# Altium PCB SCH_onelayer.PcbDoc
Units mil, origin at the board's own origin, x right, y up, seen from the top; angles counter-clockwise.
Board outline 3994.31 x 4787.81 mil, 2 copper layers (Top Layer, Bottom Layer); 42 components, 43 nets, 145 pads, 12 vias.
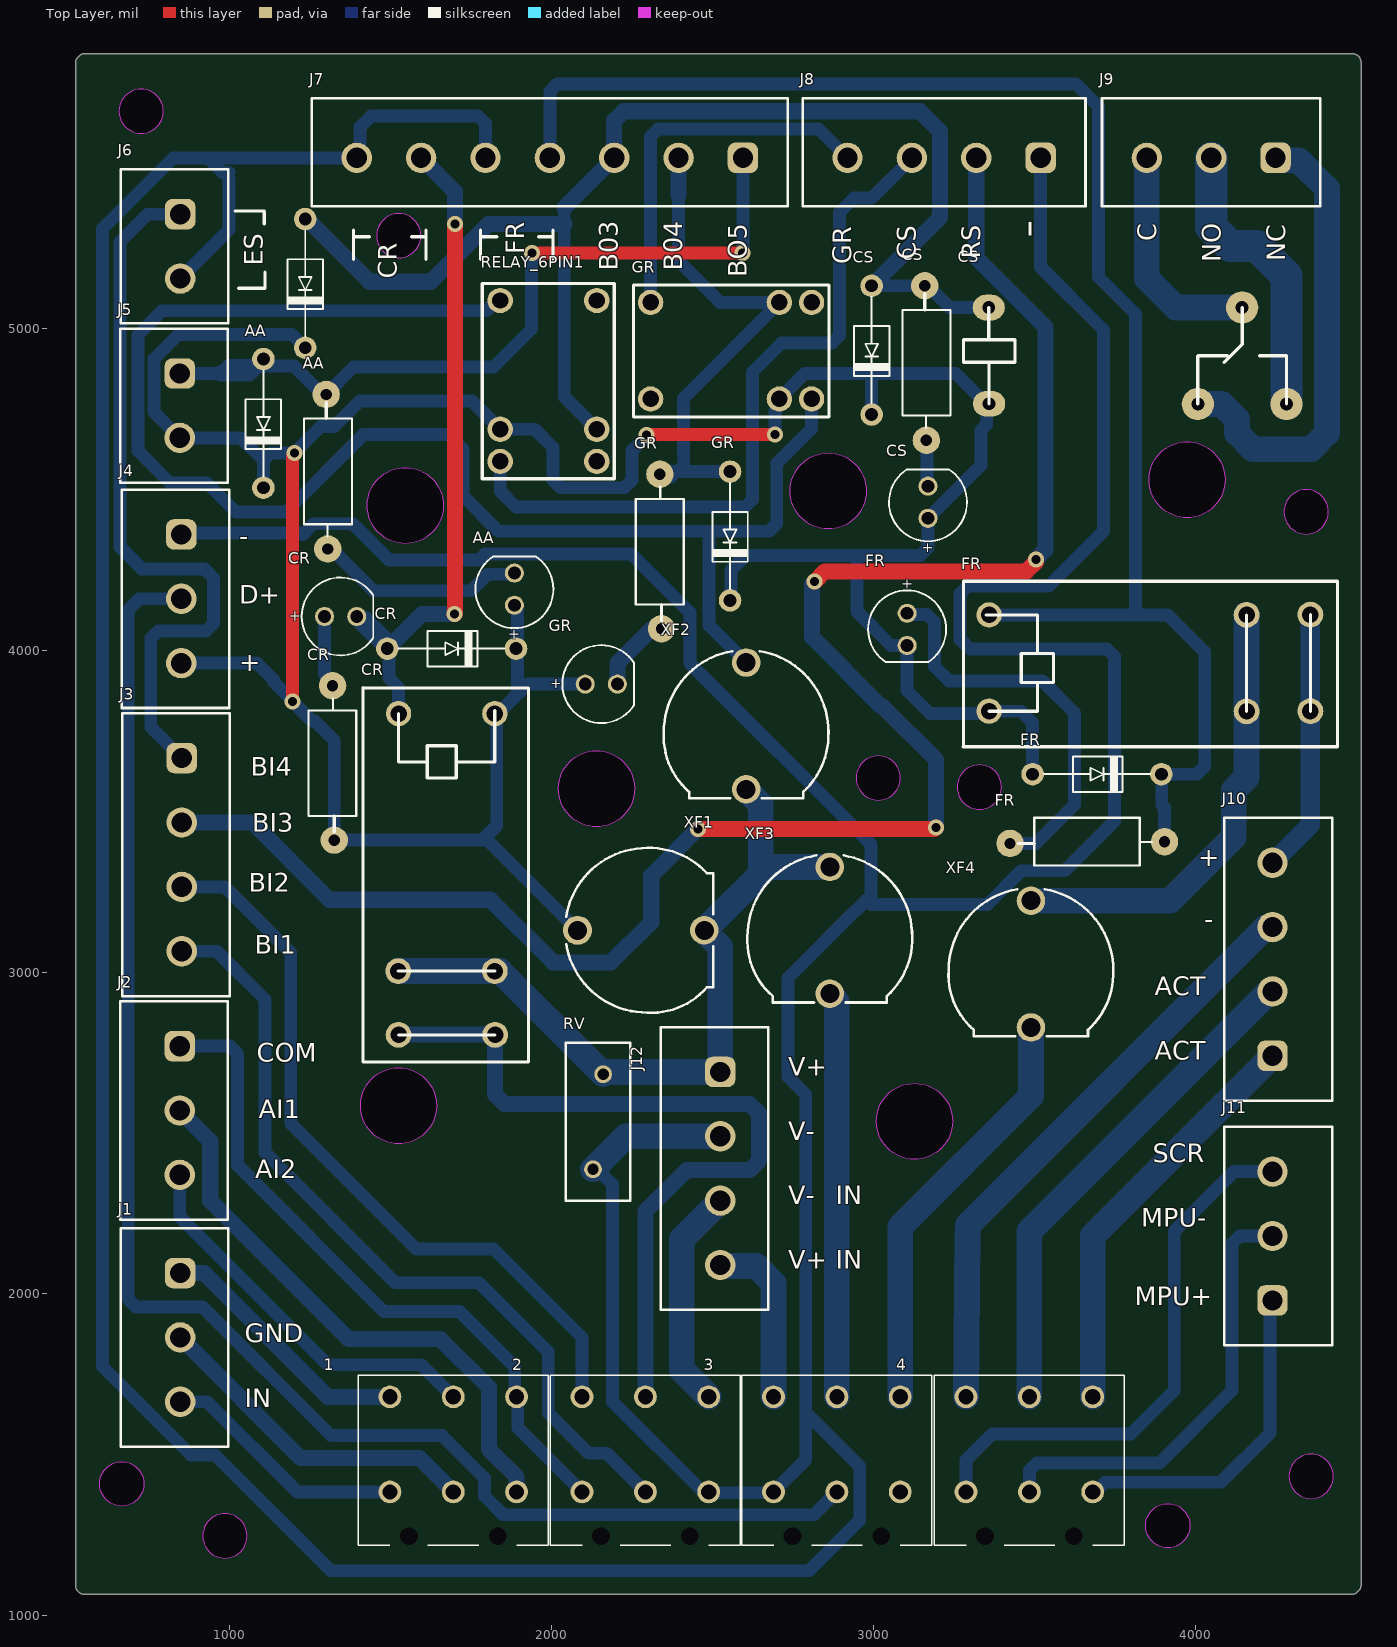
[diagram p0: Top Layer view]
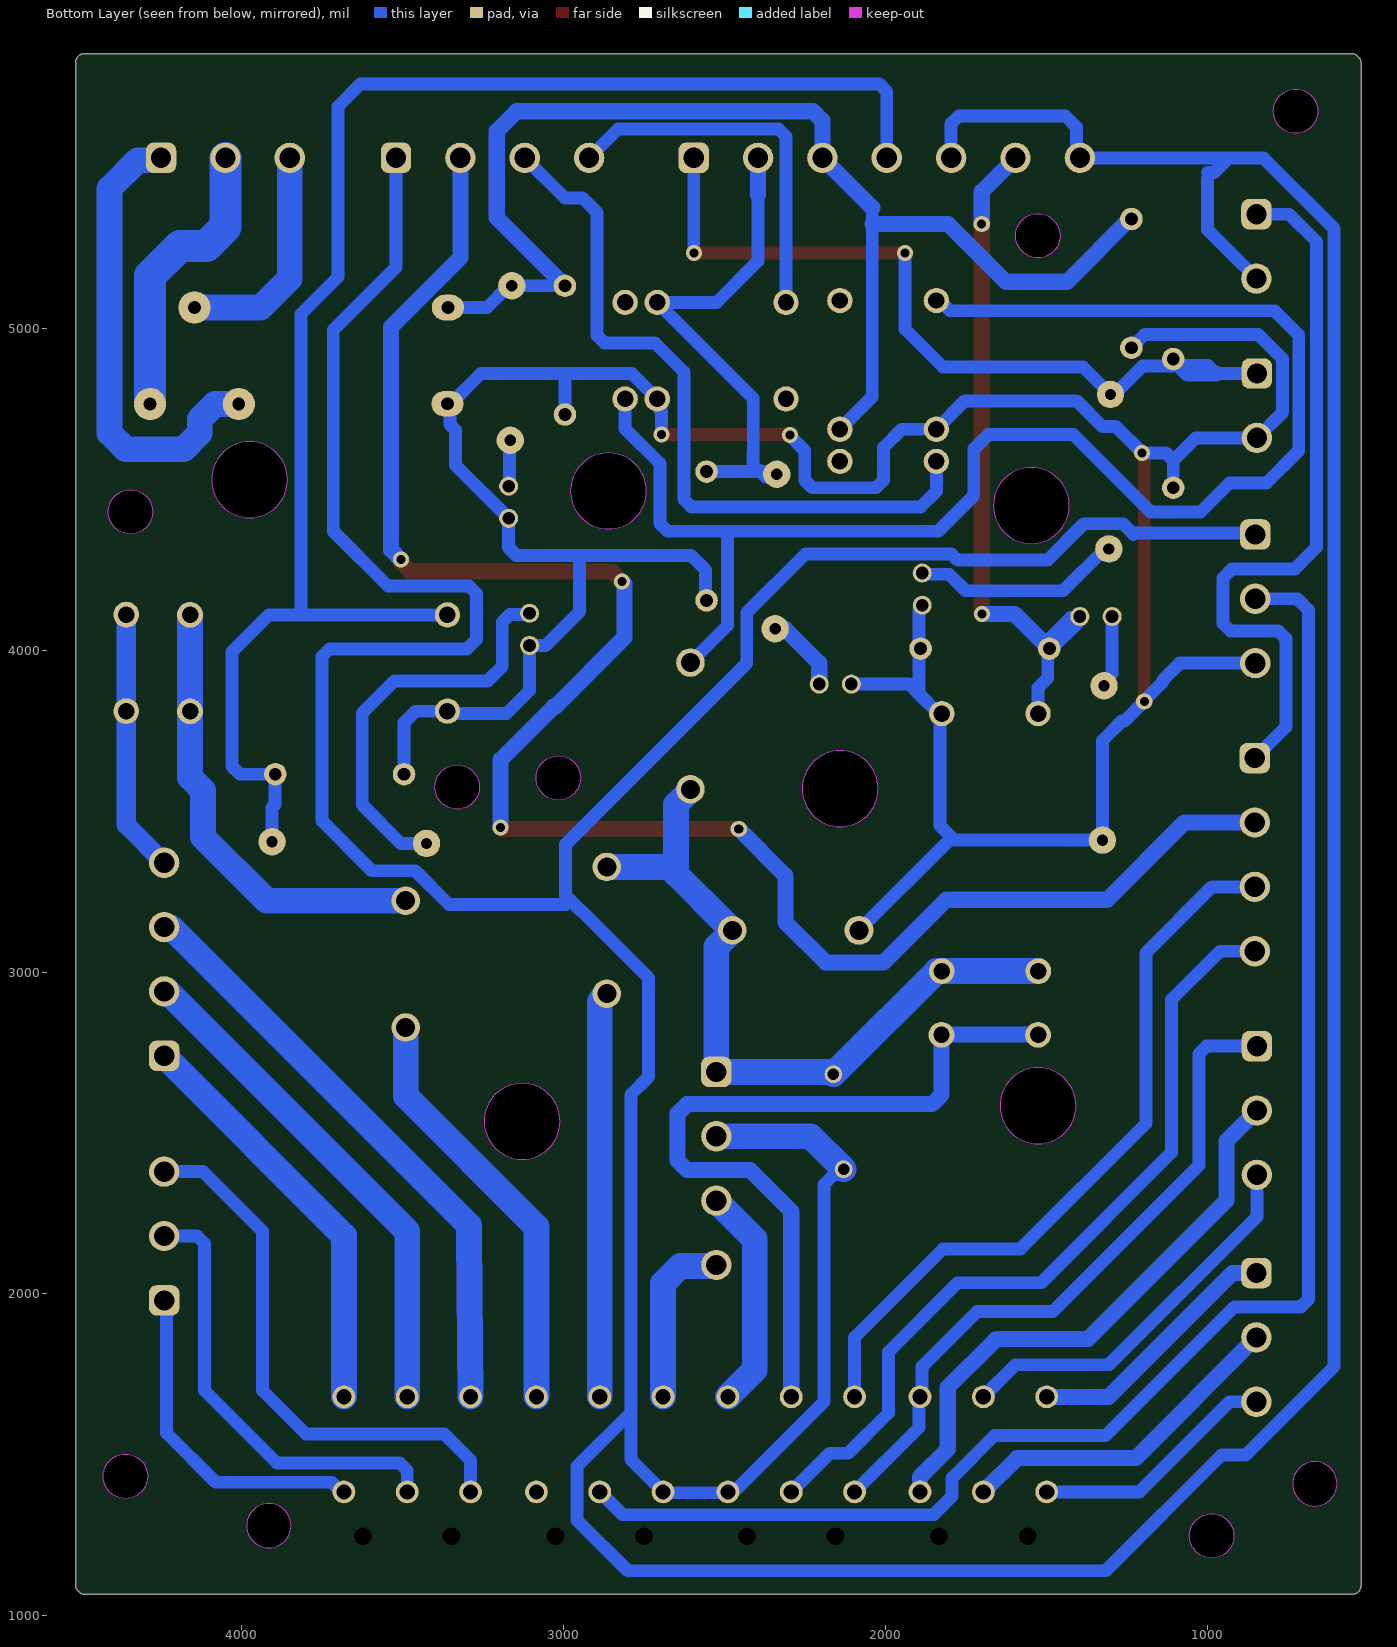
[diagram p1: Bottom Layer view, seen from below]
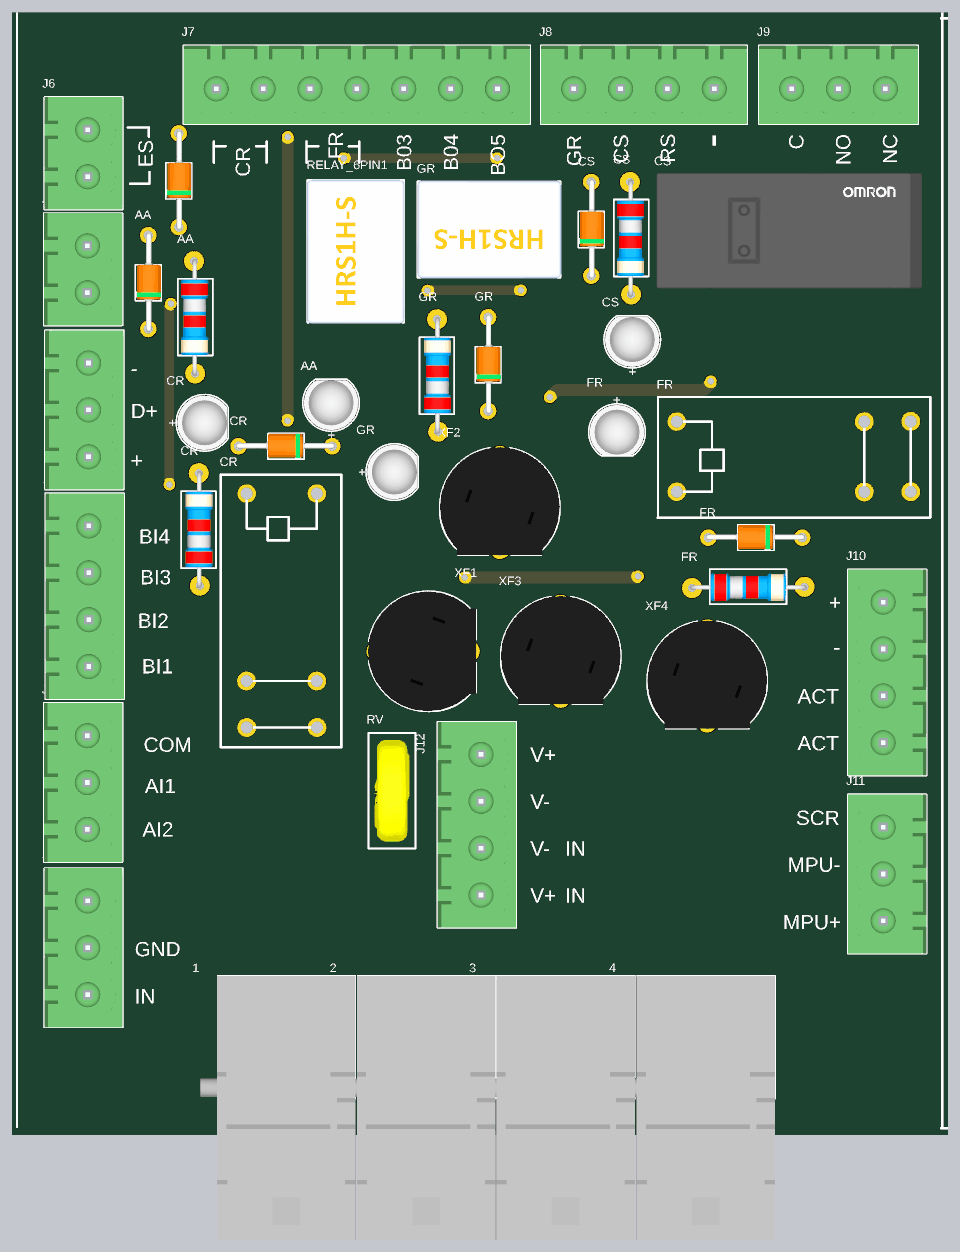
[diagram p2: 3D render of the assembled board from above, using the file's embedded part models]

## Layer stack, top to bottom
Top Solder: solder mask 0.4, Solder Resist, Dk 3.5
Top Layer: signal copper 1.4
Dielectric 1: dielectric 12.6, FR-4, Dk 4.8
Bottom Layer: signal copper 1.4
Bottom Solder: solder mask 0.4, Solder Resist, Dk 3.5

## Board outline
521.35,1101.09 521.35,5825.5 cw(c544.98,5825.5) 530.97,5844.54 cw(c550,5830.52) 550,5854.16 4487.01,5854.16 cw(c4487.01,5825.5) 4515.66,5825.5 cw(c4487.01,5825.5) 4515.5,5822.46 cw(c4487,5819.41) 4515.66,5819.41 4515.66,1095 cw(c4492.02,1095) 4506.04,1075.97 cw(c4487.01,1089.98) 4487.01,1066.35 550,1066.35 cw(c550,1095) 521.51,1098.05 cw(c550,1101.09)
cut-out: 3128.1,2418.19 cw(c3128.1,2536.3) 3009.99,2536.3 cw(c3128.1,2536.3) 3128.1,2654.41 cw(c3128.1,2536.3) 3246.21,2536.3 cw(c3128.1,2536.3)
cut-out: 4291.7,1433.19 ccw(c4360.6,1433.19) 4360.6,1364.29 ccw(c4360.6,1433.19) 4429.5,1433.19 ccw(c4360.6,1433.19) 4360.6,1502.09 ccw(c4360.6,1433.19)
cut-out: 2946.7,3603.19 ccw(c3015.6,3603.19) 3015.6,3534.29 ccw(c3015.6,3603.19) 3084.5,3603.19 ccw(c3015.6,3603.19) 3015.6,3672.09 ccw(c3015.6,3603.19)
cut-out: 656.1,5675 ccw(c725,5675) 725,5606.1 ccw(c725,5675) 793.9,5675 ccw(c725,5675) 725,5743.9 ccw(c725,5675)
cut-out: 1456.7,5288.19 ccw(c1525.6,5288.19) 1525.6,5219.29 ccw(c1525.6,5288.19) 1594.5,5288.19 ccw(c1525.6,5288.19) 1525.6,5357.09 ccw(c1525.6,5288.19)
cut-out: 3261.1,3575 ccw(c3330,3575) 3330,3506.1 ccw(c3330,3575) 3398.9,3575 ccw(c3330,3575) 3330,3643.9 ccw(c3330,3575)
cut-out: 916.7,1248.19 ccw(c985.6,1248.19) 985.6,1179.29 ccw(c985.6,1248.19) 1054.5,1248.19 ccw(c985.6,1248.19) 985.6,1317.09 ccw(c985.6,1248.19)
cut-out: 3846.1,1280 cw(c3915,1280) 3915,1348.9 cw(c3915,1280) 3983.9,1280 cw(c3915,1280) 3915,1211.1 cw(c3915,1280)
cut-out: 665,1341.1 cw(c665,1410) 596.1,1410 cw(c665,1410) 665,1478.9 cw(c665,1410) 733.9,1410 cw(c665,1410)
cut-out: 2860,4376.89 cw(c2860,4495) 2741.89,4495 cw(c2860,4495) 2860,4613.11 cw(c2860,4495) 2978.11,4495 cw(c2860,4495)
cut-out: 2140,3451.89 cw(c2140,3570) 2021.89,3570 cw(c2140,3570) 2140,3688.11 cw(c2140,3570) 2258.11,3570 cw(c2140,3570)
cut-out: 1545.88,4331.69 cw(c1545.88,4449.8) 1427.77,4449.8 cw(c1545.88,4449.8) 1545.88,4567.91 cw(c1545.88,4449.8) 1663.99,4449.8 cw(c1545.88,4449.8)
cut-out: 3975,4411.89 cw(c3975,4530) 3856.89,4530 cw(c3975,4530) 3975,4648.11 cw(c3975,4530) 4093.11,4530 cw(c3975,4530)
cut-out: 4276.1,4430 ccw(c4345,4430) 4345,4361.1 ccw(c4345,4430) 4413.9,4430 ccw(c4345,4430) 4345,4498.9 ccw(c4345,4430)
cut-out: 1525,2466.89 cw(c1525,2585) 1406.89,2585 cw(c1525,2585) 1525,2703.11 cw(c1525,2585) 1643.11,2585 cw(c1525,2585)

## Design rules (kind name [scope] priority, off if disabled: settings)
Clearance [All] p1: gap=10 ignorepadtopadclearanceinfootprint=FALSE except(0: Arc-Hole Track-Hole SMDPad-Hole THPad-Hole Via-Hole Fill-Hole Poly-Hole Region-Hole Text-Hole)
PolygonConnect [All] p1: connectstyle=Relief reliefconductorwidth=10 reliefentries=4 polygonreliefangle="90 Angle" airgapwidth=10
RoutingVias [All] p1: holewidth=28 width=50 viastyle="Through Hole" minholewidth=28 minwidth=50 maxholewidth=28 maxwidth=50
SolderMaskExpansion [All] p1: expansion=4 istentingtop=FALSE
Width [All] p1: maxlimit=100 minlimit=40 preferedwidth=50
30 further rules are at their usual default settings.

## Classes and differential pairs
component class SCH_onelayer: 1 2 3 4 AA CR CS FR GR J1 J2 J3 J4 J5 J6 J7 J8 J9 J10 J11 J12 RV XF1 XF2 XF3 XF4

## Components (designator, comment, footprint, x,y, rotation, side; value= is the part's Value field where it differs from the comment)
1 "Domino AML-6-1853531" AML-6-1853531 1698.15,1205.12 r90 top
2 "Domino AML-6-1853531" AML-6-1853531 2295,1205.12 r90 top
3 "Domino AML-6-1853531" AML-6-1853531 2890,1205.12 r90 top
4 "Domino AML-6-1853531" AML-6-1853531 3488.15,1205.12 r90 top
AA "Res" RES-1/2W 1305,4575 r270 top
AA "Diode" DIO-1A 1105,4905 r270 top value=1N5007
AA "Super Red, 2.1V, 40deg" WL-TMRC_5mm 1885,4190 r90 top
CR "" "Relay 6 pin SMIH-SL-A" 1734.15,3023.18 r90 top
CR "Res" RES-1/2W 1320,3630 r90 top
CR "Diode" DIO-1A 1490,4005 r0 top value=1N5007
CR "Super Red, 2.1V, 40deg" WL-TMRC_5mm 1344.99,4104.99 r0 top
CS "Res" RES-1/2W 3165,4912.5 r270 top
CS "Diode" DIO-1A 2995,5132.5 r270 top value=1N5007
CS "Relay G2RL-1-24VDC" G2RL-1-24VDC 3840,4895 r0 top
CS "Super Red, 2.1V, 40deg" WL-TMRC_5mm 3170.01,4459.99 r90 top
FR "Res" RES-1/2W 3645,3405 r0 top
FR "Diode" DIO-1A 3495,3615 r0 top value=1N5007
FR "" "Relay 6 pin SMIH-SL-A" 4140,4020 r180 top
FR "Super Red, 2.1V, 40deg" WL-TMRC_5mm 3105,4065 r270 top
GR "Res" RES-1/2W 2336.91,4286.91 r90 top
GR "Super Red, 2.1V, 40deg" WL-TMRC_5mm 2155,3895 r0 top
GR "Diode" DIO-1A 2555,4555 r270 top value=1N5007
GR "relay 6 pin" "relay 6 pin" 2510,4960 r180 top
J1 "691311500103" 691311500103 828.73,1865 r270 top
J2 "691311500103" 691311500103 827.28,2570 r270 top
J3 "691311500104" 691311500104 833.65,3365 r270 top
J4 "691311500103" 691311500103 832.28,4160 r270 top
J5 "691311500102" 691311500102 827.28,4760 r270 top
J6 "691311500102" 691311500102 828.73,5255 r270 top
J7 "691311500107" 691311500107 1995,5547.72 r180 top
J8 "691311500104" 691311500104 3220,5547.72 r180 top
J9 "691311500103" 691311500103 4050,5547.72 r180 top
J10 "691311500104" 691311500104 4258.19,3040 r90 top
J11 "691311500103" 691311500103 4258.19,2180 r90 top
J12 "691311500104" 691311500104 2506.81,2390 r270 top
RELAY_6PIN1 "relay 6 pin" "relay 6 pin" 2020,4885 r90 top
RV "820512001" D12.5xW5.1xH15.5xP0.8 2145,2535 r270 top
XF1 "696309001002" 696309001002#1 2278.15,3130 r180 top
XF2 "696309001002" 696309001002#2 2605,3765 r90 top
XF3 "696309001002" 696309001002#2 2865,3130 r90 top
XF4 "696309001002" 696309001002#2 3490,3025 r90 top
? "Diode" DIO-1A 1235,5340 r270 top value=1N5007

## Footprints (in the part's own frame and the unit in brackets; to place one, negate y for a bottom-side part, rotate by r counter-clockwise, add the part's x,y. Pads: shape width x height; smd on the part's side, far side on the other; paste and mask are expansions set on the pad)
691311500102 [mm] "5,08mm - PCB Headers - Vertical - Closed ends -02p"
  rrect50% 2.4x2.4 hole 1.6: 1(-2.54,0.45)
  round 2.4 hole 1.6: 2(2.54,0.45)
  silkscreen extent -6.08,-4.25 6.08,4.25, body extent -6.08,-4.25 6.08,4.25, height 12.05
691311500103 [mm] "5,08mm - PCB Headers - Vertical - Closed ends -03p"
  rrect50% 2.4x2.4 hole 1.6: 1(-5.08,0.45)
  round 2.4 hole 1.6: 2(0,0.45) 3(5.08,0.45)
  silkscreen extent -8.62,-4.25 8.62,4.25, body extent -8.62,-4.25 8.62,4.25, height 12.05
691311500104 [mm] "5,08mm - PCB Headers - Vertical - Closed ends -04p"
  rrect50% 2.4x2.4 hole 1.6: 1(-7.62,0.45)
  round 2.4 hole 1.6: 2(-2.54,0.45) 3(2.54,0.45) 4(7.62,0.45)
  silkscreen extent -11.16,-4.25 11.16,4.25, body extent -11.16,-4.25 11.16,4.25, height 12.05
691311500107 [mm] "5,08mm - PCB Headers - Vertical - Closed ends -07p"
  rrect50% 2.4x2.4 hole 1.6: 1(-15.24,0.45)
  round 2.4 hole 1.6: 2(-10.16,0.45) 3(-5.08,0.45) 4(0,0.45) 5(5.08,0.45) 6(10.16,0.45) 7(15.24,0.45)
  silkscreen extent -18.78,-4.25 18.78,4.25, body extent -18.78,-4.25 18.78,4.25, height 12.05
696309001002#1 [mm] "SHOCKSAFE FUSEHOLDERS - PCB - TURN’N LOCK COVER - THT"
  round 2.25 hole 1.5: 1(-5,0)
  round 2.286 hole 1.5: 2(5,0)
  silkscreen extent -5.7,-6.5 5.91,6.51, body extent -5.7,-6.5 6,6.5, height 33.37
696309001002#2 [mm] "SHOCKSAFE FUSEHOLDERS - PCB - TURN’N LOCK COVER - THT"
  round 2.25 hole 1.5: 1(-5,0) 2(5,0)
  silkscreen extent -5.7,-6.5 5.91,6.51, body extent -5.7,-6.5 6,6.5, height 33.37
AML-6-1853531 [mm]
  round 1.8 hole 1.2: 1(4.572,5.08) 2(12.072,5.08) 3(4.572,0.08) 4(12.072,0.08) 5(4.572,-4.92) 6(12.072,-4.92)
  round 1.2 hole 1.4 unplated: MH1(1.072,3.58) MH2(1.072,-3.42)
  silkscreen extent 0.37,-7.42 13.77,7.58, body extent -14.88,-7.38 13.72,9.42, height 23.5
D12.5xW5.1xH15.5xP0.8 [mm] "Disk Varistor, Diameter 12.5mm, Width 5.1mm"
  round 1.4 hole 0.9: 1(-3.75,0.4) 2(3.75,-0.4)
  silkscreen extent -6.25,-2.55 6.25,2.55, body extent -5.5,-1.87 5.5,1.88, height 13.3
DIO-1A [mil]
  round 70 hole 40: 1(0,0) 2(400,0)
  silkscreen extent 35,-55 365,55, body extent -11,-50 411,54, height 102
G2RL-1-24VDC [mil]
  oval 100x80 hole 40: 1(-480,-128.82) 5(-481.18,170)
  round 100 hole 40: 2(168.43,-130) 3(444.02,-130) 4(306.22,170)
  silkscreen extent -560,-130 444,170, body extent -567,-216 567,276, height 618
"relay 6 pin" [mm]
  round 2 hole 1.3 paste+0 mask+0.051: 1(5.126,4.55) 2(-5.034,4.55) 3(-7.574,4.55) 4(-7.574,-3.07) 5(-5.034,-3.07) 6(5.126,-3.07)
  silkscreen extent -8.94,-4.44 6.48,5.97, body extent -9.07,-4.54 6.53,6.06, height 11.7
"Relay 6 pin SMIH-SL-A" [mil]
  round 80 hole 51.18 paste+0 mask+2: 12(-20,210) 12(-20,-90) 14(-218.18,-90.85) 14(-218.18,209.15)
  round 78.74 hole 51.18 paste+0 mask+2: A1(780,209.21) A2(780,-90)
  silkscreen extent -302,-195 861,320
RES-1/2W [mil]
  round 85 hole 35: 1(-220,-5) 2(260,0)
  silkscreen extent -195,-74 221,75, body extent -230,-60 270,56, height 121
WL-TMRC_5mm [mm] "THT Mono-color Round Color LED, 2-leads"
  round 1.5 hole 1: 1(-1.27,0) 2(1.27,0)
  silkscreen extent -3.07,-3.07 2.58,3.08, body extent -2.95,-2.95 2.45,2.95, height 9.2

## Part data
AA CR CS FR GR: Manufacturer="Generic Components", Class=Passive, Published=08/06/2000, Publisher="Altium Hobart Technology Centre", SubClass=R
AA CR CS FR GR ?: "Default Diode", Code - JEDEC=DO-214-AB, Published=8-Jun-2000, Publisher="Altium Limited", Revision="July-2002: Re-released for DXP Platform."
AA CR CS FR GR: library part 151051SS04000, "WL-TMRC THT Mono-color Round Color, size 5mm, Super Red, 2.1V, 40deg", Emitting Color="Super Red", Forward Voltage=2.1V, Operating Temperature="-40 to +85degC", Chip Technology=AlInGaP, ComponentLink1Description=Manufacturer, ComponentLink1URL=http://www.we-online.de, ComponentLink2Description=Datasheet, ComponentLink2URL=https://katalog.we-online.de/led/datasheet/151051SS04000.pdf, Dominant Wavelength=635nm, Luminous Intensity=250mcd, Mounting Technology=THT, Packaging=Bulk, Part Number=151051SS04000, Peak Wavelength=640nm, Published Date="January 2021", Publisher="Wurth Elektronik", Size=5mm, Viewing Angle=40deg
CR FR: library part "Relay DMIH-05/12/24VDC-SL-A songle 16A 6pin"
J1 J2 J4 J9 J11: "WR-TBL Serie 311 Close Vertical PCB Header, Pluggable, THT, pitch 5.08mm, 3p", Manufacturer="Wurth Elektronik", Operating Temperature="-40 to +105degC", Rated Current [UL]=20A, Working Voltage [UL]=300VAC, Application=Pluggable, ComponentLink1Description=Manufacturer, ComponentLink1URL=http://www.we-online.de, ComponentLink2Description=Datasheet, ComponentLink2URL=https://katalog.we-online.de/em/datasheet/691311500103.pdf, Manufacturer Part Number=691311500103, Modularity=No, Mounting Technology=THT, Packaging=Box, PCB/Cable/Panel=PCB, Pin Number=3, Pitch=5.08mm, Published Date="Feburary 2021", Type=Vertical
J3 J8 J10 J12: "WR-TBL Serie 311 Close Vertical PCB Header, Pluggable, THT, pitch 5.08mm, 4p", Manufacturer="Wurth Elektronik", Operating Temperature="-40 to +105degC", Rated Current [UL]=20A, Working Voltage [UL]=300VAC, Application=Pluggable, ComponentLink1Description=Manufacturer, ComponentLink1URL=http://www.we-online.de, ComponentLink2Description=Datasheet, ComponentLink2URL=https://katalog.we-online.de/em/datasheet/691311500104.pdf, Manufacturer Part Number=691311500104, Modularity=No, Mounting Technology=THT, Packaging=Box, PCB/Cable/Panel=PCB, Pin Number=4, Pitch=5.08mm, Published Date="Feburary 2021", Type=Vertical
J5 J6: "WR-TBL Serie 311 Close Vertical PCB Header, Pluggable, THT, pitch 5.08mm, 2p", Manufacturer="Wurth Elektronik", Operating Temperature="-40 to +105degC", Rated Current [UL]=20A, Working Voltage [UL]=300VAC, Application=Pluggable, ComponentLink1Description=Manufacturer, ComponentLink1URL=http://www.we-online.de, ComponentLink2Description=Datasheet, ComponentLink2URL=https://katalog.we-online.de/em/datasheet/691311500102.pdf, Manufacturer Part Number=691311500102, Modularity=No, Mounting Technology=THT, Packaging=Box, PCB/Cable/Panel=PCB, Pin Number=2, Pitch=5.08mm, Published Date="Feburary 2021", Type=Vertical
J7: "WR-TBL Serie 311 Close Vertical PCB Header, Pluggable, THT, pitch 5.08mm, 7p", Manufacturer="Wurth Elektronik", Operating Temperature="-40 to +105degC", Rated Current [UL]=20A, Working Voltage [UL]=300VAC, Application=Pluggable, ComponentLink1Description=Manufacturer, ComponentLink1URL=http://www.we-online.de, ComponentLink2Description=Datasheet, ComponentLink2URL=https://katalog.we-online.de/em/datasheet/691311500107.pdf, Manufacturer Part Number=691311500107, Modularity=No, Mounting Technology=THT, Packaging=Box, PCB/Cable/Panel=PCB, Pin Number=7, Pitch=5.08mm, Published Date="Feburary 2021", Type=Vertical
RV: "WE-VD Disk Varistor, D12.5mm, W5.1mm, H15.5mm, 20VAC, 26VDC", (Channel) Input Capacitance=4250pF, (Reverse) Breakdown Voltage=33V, (Reverse) Peak Pulse Current=500A, AC Operating Voltage=20V, Clamping Voltage=65V, DC Operating Voltage=26V, Manufacturer="Wurth Elektronik", Operating Temperature="-40 to +85degC", Power Dissipation=0.05W, ComponentLink1Description=Manufacturer, ComponentLink1URL=http://www.we-online.de, ComponentLink2Description=Datasheet, ComponentLink2URL=https://www.we-online.com/catalog/datasheet/820512001.pdf, Diameter=12.5mm, Energy Absorbtion=4.4J, Height max.=15.5mm, Manufacturer Part Number=820512001, Mounting Technology=THT, Packaging="Tape and Reel", Published Date="April 2020", Width max.=5.1mm, Width typ.=3.3mm
XF1 XF2 XF3 XF4: "WR-FSH Shocksafe Fuse Holder Turn and Lock Cover for PCB", Manufacturer="Wurth Elektronik", Operating Temperature="-30 to +120degC", ComponentLink1Description=Manufacturer, ComponentLink1URL=http://www.we-online.de, ComponentLink2Description=Datasheet, ComponentLink2URL=https://www.we-online.com/catalog/datasheet/696309001002.pdf, Fuse Size=5x20mm, Manufacturer Part Number=696309001002, Mounting Technology=THT, Packaging=Box, Published Date="March 2021"

## Via types
v1: diameter 50, hole 28, Top Layer to Bottom Layer, 12 vias

## Nets (pads, with @x,y where several pads share a name; then routed paths per layer and width w, separated by ;. In a path a pad name is that pad's centre, name@x,y a point inside that pad or via, vN(x,y) a via of type N, cw(c..) or ccw(c..) an arc to the next point about the centre after c; other vN are vias at no path point)
+: ?.2 AA.1@1884.99,4140.01 AA.2@1105,4505 CR.1@1325,3410 CR.2@1890,4005 CR.A2 CS.1@3170,4410 CS.1@3360,4766.18 CS.2@2995,4732.5 FR.1@3495,3615 FR.2@3105.01,4014.99 FR.A1 GR.1@2105.01,3895.01 GR.2@2555,4155 GR.2@2708.18,4780.85 J4.3 J5.2 RELAY_6PIN1.2 XF1.2 | length 9999.4
  Top Layer w40: v1(1195,3841.35) 1195,4604.16 1201.57,4610.73 v1(1201.57,4613.43) ; v1(2295.96,4669.04) 2296.91,4670 v1(2695,4670)
  Bottom Layer w40: J4.3 1085,3960 1136.52,3908.48 1136.52,3902.54 1195,3844.06 v1(1195,3841.35) 1256.63,3779.72 1265.28,3779.72 1325,3720 1325,3410 1785,3410 ; AA.2@1105,4515 1105,4590 ; ?.2 1194.02,4980.98 840.98,4980.98 765,4905 765,4740 J5.2 1035,4660 1105,4590 ; AA.1@1884.99,4140.01 1884.99,4134.85 1895,4124.84 1895,4005 1895,3874.51 ; XF1.2 1801.3,3410 1785,3410 ; GR.1@2105.01,3895.01 1925.98,3895.01 1900.24,3869.27 1830,3799.03 1830,3455 1785,3410 ; v1(2295.96,4669.04) 2295.96,4666.34 2250,4620.38 2250,4528.43 2226.57,4505 2028.43,4505 2005,4528.43 2005,4630 1948.18,4686.82 RELAY_6PIN1.2 1752.67,4775 1405,4775 1325.17,4695.17 1283.31,4695.17 v1(1201.57,4613.43) 1128.43,4613.43 1105,4590 ; GR.2@2555,4155 2558.43,4158.43 2558.43,4250 2603.43,4295 2950,4295 3146.57,4295 3170,4318.43 3170,4410 3335,4575 3335,4684.42 3352.67,4702.09 3352.67,4758.85 CS.1@3360,4766.18 ; v1(2695,4670) 2695,4742.36 2700.77,4748.13 2700.77,4773.44 2708.18,4780.85 2787.33,4860 2995,4860 ; 2950,4293.86 2950,4120 3055.01,4014.99 3105.01,4014.99 3105.01,3874.99 3176.62,3803.38 3352.59,3803.38 FR.A1 3360.16,3810.63 3459.37,3810.63 3495,3775 FR.1@3495,3615 ; CS.2@2995,4732.5 2995,4860 ; CS.1@3358.43,4766.18 3350,4766.18 3256.18,4860 2995,4860
  Bottom Layer w50: AA.2@1105,4505 AA.2@1105,4515
"+V IN": 3.2 J12.4 | length 541.8
  Bottom Layer w80: J12.4 2527.3,2087.23 2635.91,2087.23 2690,2033.14 3.2
-: 2.5 3.1 J4.1 J6.2 J7.5 J7.7 J8.1 J12.2 RV.2 | length 19030.7
  Bottom Layer w40: J6.2 929,5237.56 998.43,5306.99 998.43,5464.28 ; J4.1 J4.1@875,4360 ; J4.1@875,4365 1222.5,4365 ; 998.43,5485 977.71,5485 932.71,5530 ; 1228,4360 1261,4393 1302,4393 1383,4393 1496,4280 1774.29,4280 1793.82,4299.53 2247.83,4299.53 2430,4117.37 2430,3960 2992.83,3397.17 2992.83,3237.83 2978.91,3223.91 2946,3191 ; J7.5 1795,5636.57 1771.57,5660 1440,5660 1405.43,5625.43 1405.43,5540.43 J7.7 1155,5530 932.71,5530 ; RV.2 2132.14,2384.47 2145.53,2384.47 2190,2340 2190,1665 2465.89,1389.11 2484.71,1389.11 2.5 2491.65,1382.17 2687.05,1382.17 2790,1485.12 2790,1632 ; 2945,3192 2735,2982 2735,2675 2790,2620 2790,1632 ; 2992.83,3210 3355,3210 3460,3315 3595,3315 3750,3470 3750,3980.57 3726.57,4004 3300,4004 3270,4034 3270,4176.57 3293.43,4200 3545,4200 3715,4370 3715,4995 3520,5190 J8.1 ; 932.71,5530 825,5530 605,5310 605,1775 880,1500 955,1500 1315,1140 2800,1140 2958,1298 2958,1464 2790,1632
  Bottom Layer w80: RV.2 2231.89,2490 J12.2
"-V IN": 2.6 J12.3 | length 693.8
  Bottom Layer w80: 2.6 2405,1764.09 2405,2170.47 J12.3
ACT: 4.4 J10.2 | length 1578.7
  Bottom Layer w80: 4.4 3485,2195 4227.23,2937.23 4237.7,2937.23 J10.2
"ACT 1": 4.6 J10.1 | length 1291
  Bottom Layer w80: 4.6 3681.85,2181.38 J10.1
AI1: 1.5 J2.2 | length 1785.5
  Bottom Layer w50: J2.2 940,2475 940,2290 1370,1860 1655,1860 1805.54,1709.46 1805.54,1518.1 1891.85,1431.79 1.5
AI2: 1.4 J2.3 | length 1211.8
  Bottom Layer w40: J2.3 845,2240 1305,1780 1595.39,1780 1.4
B03: ?.1 CS.1@2995,5132.5 CS.1@3160,5132.5 CS.5 J7.3 RELAY_6PIN1.5 | length 4042.2
  Bottom Layer w40: ?.1 ?.1@1235,5345 ; 2040,5375 2040,5325 2040,4787.67 RELAY_6PIN1.5 ; CS.1@2995,5132.5 3160,5132.5 3169.96,5132.5 3237.46,5065 CS.5
  Bottom Layer w50: ?.1@1235,5345 1435,5145 1625,5145 1805,5325 2040,5325 ; 2040,5375 J7.3 2195,5645.71 2224.29,5675 3145,5675 3207,5613 3207,5344.5 CS.1@2995,5132.5
B04: GR.1@2555,4555 GR.2@2336.91,4546.91 GR.5 J7.2 | length 1574.3
  Bottom Layer w40: GR.2@2370,4537.82 2390.79,4558.61 2408.61,4558.61 2410,4560 ; GR.2@2370,4550 2375,4555 2408.61,4555 GR.1@2555,4555 ; 2395,4560 2410.93,4575.93 2410.93,4609.07 2410,4610 2410,4782.67 GR.5 2524.15,5080.85 2395,5210 2395,5415
  Bottom Layer w50: 2395,5415 J7.2
B05: AA.1@1105,4905 AA.1@1300,4795 J5.1 J7.1 | length 2564.1
  Top Layer w40: v1(1939.04,5234.04) 1939.19,5234.19 2593.87,5234.19 v1(2594.02,5234.33)
  Bottom Layer w40: J5.1 971.93,4860 996.93,4885 1105,4885 1107.18,4882.82 1200.25,4882.82 1288.08,4795 1300,4795 1385,4880 1820,4880 1938.34,4998.34 1938.34,5233.34 v1(1939.04,5234.04) ; v1(2594.02,5234.33) 2595,5235.32 J7.1
  Bottom Layer w50: 971.93,4860 1060,4860 AA.1@1105,4905
BI1: 2.3 J3.4 | length 2525.9
  Bottom Layer w40: J3.4 960,3065 1110,2915 1110,2440 1515,2035 1775,2035 1990,1820 1990,1630 2115,1505 2171.97,1505 2.3
BI2: 2.2 J3.3 | length 2318.6
  Bottom Layer w40: J3.3 985,3265 1190,3060 1190,2530 1580,2140 1820,2140 2095,1865 2.2
BI3: J3.2 J8.2 | length 5781.4
  Top Layer w50: v1(2455,3445) 3190,3445 v1(3195,3450) ; v1(2817.97,4213.7) 2849.27,4245 3475.71,4245 3505,4274.29 v1(3505,4282)
  Bottom Layer w50: J3.2 1070,3465 1310,3225 1810,3225 2005,3030 2185,3030 2310,3155 2310,3300 v1(2455,3445) ; v1(2817.97,4213.7) 2810,4205.73 2810,4040 3025,3825 3030,3825 3195,3660 v1(3195,3450) ; J8.2 3320,5219.88 3535,5004.88 3535,4312 v1(3505,4282)
BI4: J3.1 J6.1 | length 2268.5
  Bottom Layer w40: J6.1 745,5355 660,5270 660,4320 726.92,4253.08 921.92,4253.08 950,4225 950,4083.43 926.57,4060 778.43,4060 755,4036.57 755,3761.36 J3.1
COM: 1.6 2.1 J2.1 | length 2132
  Bottom Layer w40: J2.1 1001.57,2770 1025,2746.57 1025,2400 1480,1945 1715,1945 1885.94,1774.06 1885.94,1686.3 1.6 1895.16,1677.09 1895.16,1584.96 2.1
"COM RLCR": 2.4 CR.14 | length 2486.9
  Bottom Layer w50: CR.14@1511.14,2806.82 1825,2806.82 1825,2619.29 1854.29,2590 2615.71,2590 2645,2560.71 2645,2414.29 2615.71,2385 2420,2385 2291.85,2256.85 2.4
COM_RL: CS.4 J9.3 | length 708.5
  Bottom Layer w80: J9.3 3850,5155 3940,5065 CS.4
CR: 1.2 J1.1 | length 811
  Bottom Layer w50: J1.1 920.93,2065 1305.54,1680.39 1.2
CS: J8.3 RELAY_6PIN1.3 | length 2297.4
  Bottom Layer w40: RELAY_6PIN1.3 1840.85,4494.15 1890,4445 2601.57,4445 2625,4468.43 2625,4865 2715,4955 2871.57,4955 2895,4978.43 2895,5360 2940,5405 2995,5405 J8.3
D+: 3.3 J4.2 | length 4862.5
  Bottom Layer w40: J4.2 720,4160 685,4125 685,1983.43 708.43,1960 915,1960 1315,1560 1660,1560 1792,1428 1792,1372 1850,1314 2815.73,1314 3.3
F2: GR.3 RELAY_6PIN1.1 XF2.2 | length 4804.3
  Bottom Layer w40: RELAY_6PIN1.1 1830.37,5086.82 1798.55,5055 790,5055 715,4980 715,4620 815,4520 930,4520 1020,4430 1175,4430 1415,4670 1680,4670 1725,4625 1725,4480 1835,4370 2490,4370 2676.57,4370 2700,4393.43 2700,4580 2808.18,4688.18 GR.3 ; 2480,4370 2490,4360 2490,4076.85 XF2.2
F3: 3.4 XF3.1 | length 1261.8
  Bottom Layer w80: XF3.1 2865,2930.83 2886.85,2908.98 3.4
F4: 3.6 XF4.1 | length 1316.1
  Bottom Layer w80: 3.6 3083.7,2208.7 3490,2615 XF4.1
GR: GR.6 J8.4 | length 1174.5
  Bottom Layer w40: GR.6 2308.18,5596.57 2331.61,5620 2830,5620 J8.4
J71: CR.1@1490,4005 CR.2@1395,4105 CR.A1 J7.6 | length 2224.2
  Top Layer w50: v1(1699.15,4113.24) 1700,4114.09 v1(1700,5325)
  Bottom Layer w40: CR.2@1395,4105 1398.65,4101.35 1423.65,4101.35 1495,4030 1495,3913.6 1524.94,3883.66 CR.A1
  Bottom Layer w50: CR.2@1395,4105 1395,4100 1408.65,4086.35 1480,4015 1490,4005 1505,4020 1598.24,4113.24 v1(1699.15,4113.24) ; J7.6 1700,5425 v1(1700,5325)
J74: FR.2@3895,3615 FR.2@3905,3405 FR.A2 J7.4 | length 5010
  Bottom Layer w40: J7.4 1995,5736.57 2018.43,5760 3630,5760 3700,5690 3700,5160 3815,5045 3815,4110 ; FR.A2 3815,4110 ; FR.2@3905,3405 3905,3511.33 3896.33,3520 3896.33,3613.67 3895,3615 4005,3615 4030,3640 4030,3995 3915,4110 3815,4110
MPU+: 4.5 J11.1 | length 1042
  Bottom Layer w40: 4.5 3690.2,1385.12 3720.08,1415 4080,1415 4233.23,1568.23 4233.23,1972.76 J11.1
MPU-: 4.3 J11.2 | length 1391.1
  Bottom Layer w40: 4.3 3485,1451.57 3508.43,1475 3890,1475 4115,1700 4115,2156.57 4138.43,2180 J11.2
"NC RL": CS.2@4008.43,4765 J9.1 | length 1464.9
  Bottom Layer w80: CS.2@4008.43,4765 4083.14,4765 4130,4718.14 4130,4675 4180,4625 4360,4625 4410,4675 4410,5435 4322.24,5522.76 4257.24,5522.76 J9.1
NetAA_2: AA.2@1305,4315 AA.2@1884.99,4240.01 | length 656.6
  Bottom Layer w40: AA.2@1305,4315 1317.18,4315 1447.18,4185 1750,4185 1801.36,4236.36 1881.35,4236.36 AA.2@1884.99,4240.01
NetCR_1: CR.1@1295,4105 CR.2@1320,3890 | length 225.4
  Bottom Layer w40: CR.1@1295,4105 1295,3927.18 1320,3902.18 CR.2@1320,3890
NetCS_2: CS.2@3165,4652.5 CS.2@3170,4510 | length 149.2
  Bottom Layer w30: CS.2@3165,4652.5 CS.2@3171.25,4646.25
  Bottom Layer w40: CS.2@3171.25,4646.25 3167.5,4642.5 3167.5,4516.15 CS.2@3173.65,4510
NetFR_1: FR.1@3105.01,4114.99 FR.1@3425,3400 | length 1263.9
  Bottom Layer w40: FR.1@3105.01,4114.99 3108.65,4111.35 3166.57,4111.35 3190,4087.92 3190,3950 3235,3905 3525,3905 3625,3805 3625,3520 3505,3400 FR.1@3425,3400
NetFR_12: FR.12 XF4.2 | length 1418.6
  Bottom Layer w80: XF4.2 3921.85,3221.85 4120,3420 4120,3565 4160,3605 4160,3810 FR.12@4160,4110
NetGR_1: GR.1@2341.91,4066.91 GR.2@2205.01,3895.01 | length 246.2
  Bottom Layer w50: GR.2@2205.01,3895.01 2205.01,3960.01 2311.91,4066.91 GR.1@2341.91,4066.91
"NO RL": CS.3 J9.2 | length 910.5
  Bottom Layer w100: J9.2 4050,5315 4108.58,5256.42 4191.42,5256.42 4284.02,5163.83 CS.3
"PM GND": 1.3 J1.2 | length 1047.3
  Bottom Layer w50: J1.2 1221.44,1490 1590.12,1490 1.3
"PM IN": 1.1 J1.3 | length 767.6
  Bottom Layer w40: J1.3 930,1665 1209.88,1385.12 1.1
"RL4 +": FR.14 J10.4 | length 819.6
  Bottom Layer w60: J10.4 4358.18,3457.71 4358.18,3810.85 FR.14@4358.18,4110.85
"RL -": 4.2 J10.3 | length 1863.9
  Bottom Layer w80: 4.2 3293.02,2180.66 3293.34,2213.34 4217.23,3137.23 4237.7,3137.23 J10.3
SCR: 4.1 J11.3 | length 1711.8
  Bottom Layer w40: 4.1 3288.15,1483.15 3370,1565 3800,1565 3935,1700 3935,2195 4120,2380 J11.3
V+: CR.12 J12.1 RV.1 XF1.1 XF2.1 XF3.2 | length 2350
  Bottom Layer w80: CR.12@1524.15,3003.18 1840.21,3003.18 2130,2713.39 RV.1 2168.11,2690 J12.1 2524.53,3078.15 2475,3127.68 XF1.1 2671.85,3326.85 XF3.2 ; XF2.1 2605,3565.83 2650,3520.83 2650,3305
pads on no net: 1.MH1 1.MH2 2.MH1 2.MH2 3.5 3.MH1 3.MH2 4.MH1 4.MH2 GR.1@2308.18,4780.85 GR.4 RELAY_6PIN1.4 RELAY_6PIN1.6

## Silkscreen, mask and mechanical layers (free items; w line width, h text height)
Top Overlay:
  lines w10: 1017.68,5365.19 1107.68,5365.19 ; 1027.68,5125.19 1110,5125.19 1110,5175.19 ; 1107.68,5325.19 1107.68,5360.19 ; 1385,5215 1385,5305 ; 1385,5285 1435,5285 ; 1565,5285 1610,5285 ; 1610,5215 1610,5305 ; 1780,5215 1780,5305 ; 1780,5285 1830,5285 ; 1960,5285 2005,5285 ; 2005,5215 2005,5305
  text "-" at 3566.37,5279.62 h200 r90
  text "C" at 3900.13,5271.69 h100 r90
  text "FR" at 1935,5230 h100 r90
  text "RS" at 3352,5215.82 h100 r90
  text "CS" at 3152,5213.23 h100 r90
  text "NC" at 4300.13,5209.53 h100 r90
  text "NO" at 4100.13,5205 h100 r90
  text "GR" at 2952.01,5200.19 h100 r90
  text "ES" at 1123.89,5195 h100 r90
  text "B03" at 2226.59,5179.75 h100 r90
  text "B04" at 2426.59,5180.02 h100 r90
  text "BO5" at 2627.01,5159.49 h100 r90
  text "CR" at 1538.89,5155 h100 r90
  text "-" at 1030,4305.76 h100
  text "D+" at 1030,4125 h100
  text "+" at 1030,3914.64 h100
  text "BI4" at 1065,3590 h100
  text "BI3" at 1070,3416.11 h100
  text "+" at 4009.96,3308.5 h100
  text "BI2" at 1060,3230 h100
  text "-" at 4027.81,3116.83 h100
  text "BI1" at 1077.75,3036.35 h100
  text "ACT" at 3875,2907.99 h100
  text "ACT" at 3875,2707.99 h100
  text "COM" at 1085,2701.11 h100
  text "V+" at 2735.09,2657.99 h100
  text "AI1" at 1090,2525 h100
  text "V-" at 2735.09,2457.99 h100
  text "SCR" at 3868.71,2389.11 h100
  text "AI2" at 1080,2340 h100
  text "V-" at 2735.09,2257.99 h100
  text "IN" at 2883.67,2257.99 h100
  text "MPU-" at 3832.91,2189.11 h100
  text "V+" at 2735.09,2057.99 h100
  text "IN" at 2883.67,2057.99 h100
  text "MPU+" at 3812.93,1944.11 h100
  text "GND" at 1046.89,1829.11 h100
  text "IN" at 1046.89,1627.99 h100
Mechanical 1:
  circle w10: c3128.1,2535 r118.11
  circle w10: c985.6,1248.19 r68.9
  circle w10: c665,1410 r68.9
  circle w10: c3915,1280 r68.9
  circle w10: c1525.6,5288.19 r68.9
  circle w10: c4360.6,1433.19 r68.9
  circle w10: c725,5675 r68.9
  circle w10: c3330,3575 r68.9
  circle w10: c3015.6,3603.19 r68.9
  circle w10: c4345,4430 r68.9
  circle w10: c3975,4530 r118.11
  circle w10: c2860,4495 r118.11
  circle w10: c1545,4450 r118.11
  circle w10: c2140,3570 r118.11
  circle w10: c1525,2585 r118.11
  lines w10: 550,1095 4487.01,1095 4487.01,5819.41 ; 550,1101.09 550,5825.5 4487.01,5825.5
  lines w47.24: 544.99,5825.5 544.99,1101.09 ccw(c550,1101.09) 546.02,1098.05 ccw(c550,1095) 550,1089.98 4487.01,1089.99 ; 550,5830.52 4487.01,5830.52 cw(c4487.01,5825.5) 4492.02,5825.5 cw(c4487.01,5825.5) 4490.99,5822.46 cw(c4487.01,5819.41) 4492.02,5819.41 4492.02,1095

## Dimensions
544.99,1101.09 to 4492.02,1095 on Top Overlay
4487.01,1095 to 4487.01,5830.52 on Top Overlay

## Text inside footprints (layer, text, board x,y; h text height)
AA: Top Overlay "+" at 1897.99,4030.55 h31.5 r90
CR: Top Overlay "+" at 1185.55,4092 h31.5
CS: Top Overlay "+" at 3183,4300.55 h31.5 r90
FR: Top Overlay "+" at 3092.01,4224.45 h31.5 r270
GR: Top Overlay "+" at 1995.55,3882.01 h31.5